# Altium PCB HumiTemPMold.PcbDoc
Units mm, origin at the board's own origin, x right, y up, seen from the top; angles counter-clockwise.
Board outline 152.4 x 101.6 mm, 2 copper layers (Top Layer, Bottom Layer); 101 components, 85 nets, 398 pads, 4 vias.
Unrouted connection lines stored in the file: 261.
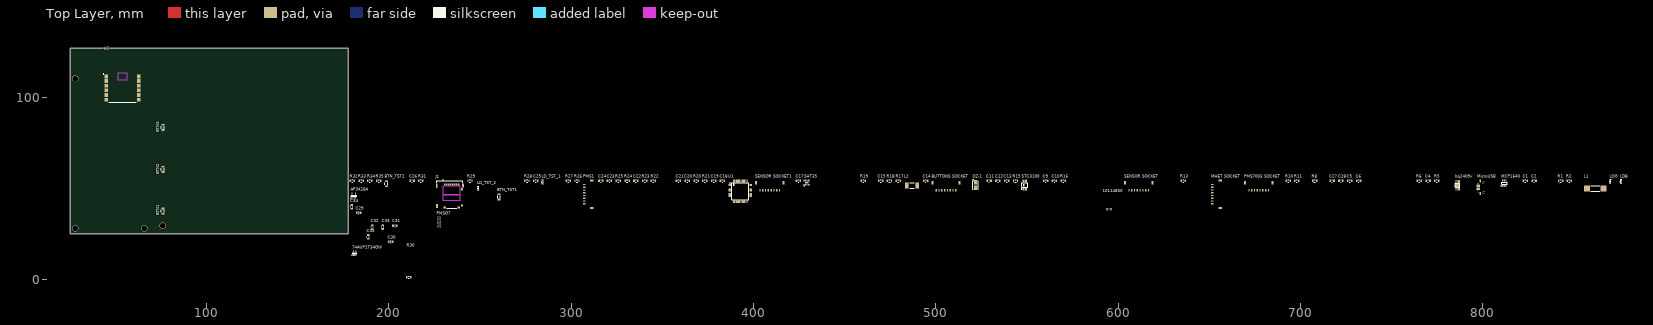
[diagram p0: Top Layer view]
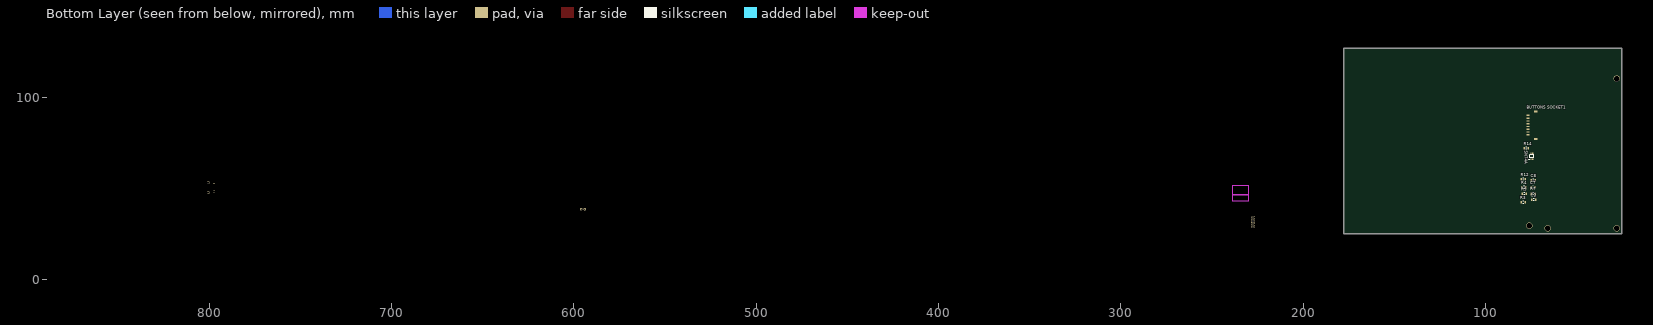
[diagram p1: Bottom Layer view, seen from below]

## Layer stack, top to bottom
Top Solder: solder mask 0.0102, Solder Resist, Dk 3.5
Top Layer: signal copper 0.0356
Dielectric 1: dielectric 0.32, FR-4, Dk 4.8
Bottom Layer: signal copper 0.0356
Bottom Solder: solder mask 0.0102, Solder Resist, Dk 3.5

## Board outline
25.4,25.4 177.8,25.4 177.8,127 25.4,127

## Design rules (kind name [scope] priority, off if disabled: settings)
Clearance [All] p1: gap=0.254 ignorepadtopadclearanceinfootprint=TRUE except(0: Arc-Hole Track-Hole SMDPad-Hole THPad-Hole Via-Hole Fill-Hole Poly-Hole Region-Hole Text-Hole; 0.15: Arc-Arc Arc-Track Arc-SMDPad Track-Track Track-SMDPad SMDPad-SMDPad Text-Text; 0.25: SMDPad-Poly SMDPad-Region)
PolygonConnect [All] p1: connectstyle=Relief reliefconductorwidth=0.254 reliefentries=4 polygonreliefangle="90 Angle" airgapwidth=0.254
RoomDefinition Esquematico [InComponentClass('Esquematico')] p1: confinementstyle=ConfineIn formatcopy=TRUE lockcomponents=FALSE outline 178.181,26.924 879.856,26.924 879.856,57.912 178.181,57.912
RoutingVias [All] p1: holewidth=0.711 width=1.27 viastyle="Through Hole" minholewidth=0.711 minwidth=1.27 maxholewidth=0.711 maxwidth=1.27
SolderMaskExpansion [All] p1: expansion=0.102
Width [All] p1: maxlimit=0.254 minlimit=0.254 preferedwidth=0.254
30 further rules are at their usual default settings.

## Components (designator, comment, footprint, x,y, rotation, side; value= is the part's Value field where it differs from the comment)
74AUP1T34GW "74AUP1T34GW" 74AUP1T34GW 181.356,14.605 r90 top
10114830 "AMPHENOL 10114830 - Conector de Cable a Placa - 1.25mm" "Molex 0353630250" 593.979,38.735 r0 top
AP3428A "AP3428A" AP3428A 180.975,46.101 r90 top
bq2409x "bq2409x" bq2409x 785.114,49.657 r90 top
BTN1 "BUTTON" BUTTON 76.2,38.1 r90 top
BTN2 "BUTTON" BUTTON 76.2,60.96 r90 top
BTN3 "BUTTON" BUTTON 76.2,83.947 r90 top
BTN_TST1 "BUTTON" BUTTON 260.477,45.847 r90 top
BTN_TST2 "BUTTON" BUTTON 198.755,53.086 r90 top
"BUTTONS SOCKET" "BUTTONS SOCKET" S8B-ZR-SM4A-TF 506.857,51.181 r90 top
"BUTTONS SOCKET1" "BUTTONS SOCKET" S8B-ZR-SM4A-TF 74.676,83.566 r180 bottom
C1 "Cap" "0805 CAP" 823.214,54.229 r0 top value=100n
C2 "Cap" "0805 CAP" 828.04,54.229 r0 top value=10u
C3 "Cap" "0805 CAP" 73.66,43.942 r180 bottom value=100n
C4 "Cap" "0805 CAP" 769.874,54.229 r0 top value=10u
C5 "Cap" "0805 CAP" 726.948,54.229 r0 top value=1u
C6 "Cap" "0805 CAP" 731.774,54.229 r0 top value=100n
C7 "Cap" "0805 CAP" 74.075,50.673 r180 bottom value=100n
C8 "Cap" "0805 CAP" 73.914,54.61 r180 bottom value=100n
C9 "Cap" "0805 CAP" 560.197,54.229 r0 top value=10u
C10 "Cap" "0805 CAP" 565.023,54.229 r0 top value=100n
C11 "Cap" "0805 CAP" 529.209,54.229 r0 top value=1u
C12 "Cap" "0805 CAP" 534.035,54.229 r0 top value=10p
C13 "Cap" "0805 CAP" 538.861,54.229 r0 top value=10u
C14 "Cap" "0805 CAP" 494.411,54.229 r0 top value=22p
C15 "Cap" "0805 CAP" 469.773,54.229 r0 top value=220n
C17 "Cap" "0805 CAP" 424.688,54.229 r0 top value=100n
C18 "Cap" "0805 CAP" 383.032,54.229 r0 top value=100n
C19 "Cap" "0805 CAP" 378.206,54.229 r0 top value=100n
C20 "Cap" "0805 CAP" 363.728,54.229 r0 top value=100n
C21 "Cap" "0805 CAP" 358.902,54.229 r0 top value=100n
C22 "Cap" "0805 CAP" 335.534,54.229 r0 top value=100n
C23 "Cap" "0805 CAP" 321.056,54.229 r0 top value=100n
C24 "Cap" "0805 CAP" 316.357,54.229 r0 top value=100n
C25 "Cap" "0805 CAP" 280.67,54.229 r0 top value=100n
C26 "Cap" "0805 CAP" 212.852,54.229 r0 top value=100n
C27 "Cap" "0805 CAP" 717.296,54.229 r0 top value=100n
C28 "Cap" "0805 CAP" 722.122,54.229 r0 top value=10u
C29 "Cap" "0805 CAP" 183.515,36.703 r0 top value=100n
C30 "Cap" "0805 CAP" 201.041,20.828 r0 top value=1u
C31 "Cap" "0805 CAP" 203.454,29.718 r0 top value=1u
C32 "Cap" "0805 CAP" 191.008,28.956 r90 top value=100n
C33 "Cap" "0805 CAP" 196.85,28.956 r90 top value=1u
C34 "Cap" "0805 CAP" 179.705,40.005 r90 top value=100n
C35 "Cap" "0805 CAP" 188.722,23.495 r90 top value=1u
DZ-1 "DZ" SMAZ5V6-TP 521.843,51.943 r90 top
J1 "MOLEX 503182-1852 (MicroSD)" "MOLEX 503182-1852 (MicroSD)" 233.559,45.964 r0 top
L1 "Inductor" INDC11030X40N 861.568,50.038 r0 top value=10u
L2 "Inductor" L2.2uH 486.918,51.689 r0 top value=2.2uH
LD_TST_1 "LED" "0603 LED-Green" 284.353,53.467 r90 top
LD_TST_2 "LED" "0603 LED-BLUE" 249.047,49.911 r90 top
LDB "LED" "0603 LED-BLUE" 875.665,53.721 r90 top
LDG "LED" "0603 LED-Green" 869.823,53.721 r90 top
MCP1640 "MCP1640" MCP1640 811.784,52.959 r90 top
"MHET SOCKET" "MHET SOCKET" S8B-ZR-SM4A-TF 653.796,45.72 r0 top
MicroUSB "MicroUSB" MicroUSB 790.067,53.975 r90 top
PMS1 "PMS7003 SOCKET" S8B-ZR-SM4A-TF 309.372,45.72 r0 top
"PMS7003 SOCKET" "PMS7003 SOCKET" S8B-ZR-SM4A-TF 678.307,51.181 r90 top
PMSG7 "PMSG7" PMSG7 226.949,29.083 r90 top
R1 "Res" "0805 Res" 842.518,54.229 r0 top value=1K5
R2 "Res" "0805 Res" 847.217,54.229 r0 top value=1K5
R3 "Res" "0805 Res" 79.502,42.418 r180 bottom value=10K
R4 "Res" "0805 Res" 79.037,50.673 r180 bottom value=10K
R5 "Res" "0805 Res" 774.7,54.229 r0 top value=10K
R6 "Res" "0805 Res" 765.048,54.229 r0 top value=976
R7 "Res" "0805 Res" 73.957,47.244 r180 bottom value=10K
R8 "Res" "0805 Res" 707.644,54.229 r0 top value=540
R9 "Res" "0805 Res" 78.994,47.117 r180 bottom value=10K
R10 "Res" "0805 Res" 693.166,54.229 r0 top value=1K
R11 "Res" "0805 Res" 697.992,54.229 r0 top value=309
R12 "Res" "0805 Res" 79.375,55.118 r180 bottom value=10K
R13 "Res" "0805 Res" 635.635,54.229 r0 top value=0
R14 "Res" "0805 Res" 77.724,72.136 r180 bottom value=10K
R15 "Res" "0805 Res" 543.687,54.229 r0 top value=30m
R16 "Res" "0805 Res" 569.849,54.229 r0 top value=430K
R17 "Res" "0805 Res" 479.425,54.229 r0 top value=1K
R18 "Res" "0805 Res" 474.599,54.229 r0 top value=200K
R19 "Res" "0805 Res" 460.121,54.229 r0 top value=100K
R20 "Res" "0805 Res" 368.554,54.229 r0 top value=10K
R21 "Res" "0805 Res" 373.38,54.229 r0 top value=1K
R22 "Res" "0805 Res" 345.186,54.229 r0 top value=4K7
R23 "Res" "0805 Res" 340.36,54.229 r0 top value=4K7
R24 "Res" "0805 Res" 330.708,54.229 r0 top value=4K7
R25 "Res" "0805 Res" 325.882,54.229 r0 top value=4K7
R26 "Res" "0805 Res" 303.276,54.229 r0 top value=10K
R27 "Res" "0805 Res" 298.45,54.229 r0 top value=10K
R28 "Res" "0805 Res" 275.844,54.229 r0 top value=1K5
R29 "Res" "0805 Res" 244.602,54.229 r0 top value=10K
R30 "Res" "0805 Res" 210.947,1.397 r0 top value=1K5
R31 "Res" "0805 Res" 217.678,54.229 r0 top value=10K
R32 "Res" "0805 Res" 180.086,54.229 r0 top value=10K
R33 "Res" "0805 Res" 184.912,54.229 r0 top value=10K
R34 "Res" "0805 Res" 189.738,54.229 r0 top value=10K
R35 "Res" "0805 Res" 194.564,54.229 r0 top value=10K
"SENSOR SOCKET" "SENSOR SOCKET" S8B-ZR-SM4A-TF 612.521,51.181 r90 top
"SENSOR SOCKET1" "SENSOR SOCKET" S8B-ZR-SM4A-TF 410.21,51.181 r90 top
SHT35 "SHT35" SHT35 429.26,53.34 r90 top
SN74A "" SN74AUP3G17DCUR 74.803,67.691 r90 bottom (schematic designator SN74AUP3G17DCUR)
STC3100 "STC3100" STC3100 548.767,51.943 r90 top
U1 "PIC32MZ2048EFH064-I/PT" PIC32MZ2048EFH064 392.811,48.514 r0 top
U2 "MRF24J40MA" MRF24J40MA 54.102,113.284 r0 top

## Footprints (in the part's own frame and the unit in brackets; to place one, negate y for a bottom-side part, rotate by r counter-clockwise, add the part's x,y. Pads: shape width x height; smd on the part's side, far side on the other; paste and mask are expansions set on the pad)
74AUP1T34GW [mm]
  rect 0.85x0.4 smd: 1(-1.1,0.65) 2(-1.1,0) 3(-1.1,-0.65) 4(1.1,-0.65) 5(1.1,0.65)
  silkscreen extent -1.22,-1.15 0.3,1.52, body extent -0.67,-1.12 0.67,1.13, height 1.1
"0603 LED-BLUE" [mm] "LED, Body 1.6x0.8mm, IPC High Density"
  rect 0.7x0.9 smd: 1(-0.75,0) 2(0.75,0)
  silkscreen extent -0.2,-0.45 1.4,0.45, body extent -0.85,-0.45 0.85,0.45, height 0.9
"0603 LED-Green" [mm] "LED, Body 1.6x0.8mm, IPC High Density"
  rect 0.7x0.9 smd: 1(-0.75,0) 2(0.75,0)
  silkscreen extent -0.2,-0.45 1.4,0.45, body extent -0.85,-0.45 0.85,0.45, height 0.9
"0805 CAP" [mm] "Chip Capacitor, 2-Leads, Body 2,00x1,25mm, IPC Medium Density"
  rect 0.9x1.4 smd: 1(-1.05,0) 2(1.05,0)
  silkscreen extent -0.2,-0.6 0.2,0.6, body extent -1,-0.6 1,0.6, height 1.2
"0805 Res" [mm] "Chip Capacitor, 2-Leads, Body 2,0x1,3mm, IPC Medium Density"
  rect 0.8x1.4 smd: 1(-1.1,0) 2(1.1,0)
  silkscreen extent -0.3,-0.6 0.3,0.6, body extent -1,-0.62 1,0.62, height 0.44
AP3428A [mm]
  rect 1.05x0.55 smd: 1(-1.325,0.95) 2(-1.325,0) 3(-1.325,-0.95) 4(1.325,-0.95) 5(1.325,0.95)
  silkscreen extent -1.45,-1.45 0.4,1.9, body extent -0.8,-1.45 0.8,1.45, height 1
bq2409x [mm]
  rect 1.5x0.25 smd: 1(0,0)
  oval 1.5x0.25 smd: 2(0,-0.5) 3(0,-1) 4(0,-1.5) 5(0,-2) 6(4.2,-2) 7(4.2,-1.5) 8(4.2,-1) 9(4.2,-0.5) 10(4.2,0)
  rect 1.57x1.88 smd: 11(2.1,-1)
  silkscreen extent 1.02,-2.16 3.17,0.25, body extent -0.43,-2.5 4.49,0.5, height 0.86
BUTTON [mm]
  rect 0.95x1.55 smd: 1(-1.8,0) 2(1.016,0)
  silkscreen extent -1.08,-0.76 0.25,0.76, body extent -1.9,-1.02 1.14,1.02, height 5.91
INDC11030X40N [mm]
  rect 3.23x3.32 smd: 1(-4.485,0) 2(4.485,0)
  silkscreen extent -2.5,-1.56 2.5,1.56, body extent -5.15,-5.15 5.15,5.15, height 4
L2.2uH [mm]
  rect 2x3.4 smd: 1(-2.87,0) 2(2.83,0)
  silkscreen extent -1.2,-1.56 1.2,1.56, body extent -3.68,-3.3 3.68,3.3, height 3
MCP1640 [mm]
  rect 1.05x0.6 smd: 1(-1.425,0.95) 2(-1.425,0) 3(-1.425,-0.95) 4(1.425,-0.95) 5(1.425,0) 6(1.425,0.95)
  silkscreen extent -1.55,-1.55 0.5,1.92, body extent -0.9,-1.55 0.9,1.55, height 1.45
MicroUSB [mm]
  rect 0.4x1.7 smd: 1(-4.445,-7.366) 2(-3.81,-7.366) 3(-3.175,-7.366) 4(-2.54,-7.366) 5(-1.905,-7.366)
  rect 1.8x0.7 smd: 5(-6.604,-8.509) 5(0.254,-8.509)
  rrect100% 1.2x1.524 hole 0.762 slot 1.2 at 90 deg: 5(-5.969,-10.287)
  rrect50% 1.1x1.3 hole 0.65 slot 1.05 at 90 deg: 5(-5.588,-7.239) 5(-0.762,-7.239)
  rrect100% 1.3x1.524 hole 0.762 slot 1.2 at 90 deg: 5(-0.508,-10.287)
  body extent -7.22,-13.12 0.82,-7.08, height 2.8
"MOLEX 503182-1852 (MicroSD)" [mm]
  rect 0.8x1.24 smd: 1(-2.9,6.355) 2(-1.8,6.355) 3(-0.7,6.355) 4(0.4,6.355) 5(1.5,6.355) 6(2.6,6.355) 7(3.7,6.355) 8(4.8,6.355)
  rect 1.16x1.2 smd: DT(6.74,-5.275)
  rect 0.95x2.5 smd: P1(-7.245,5.725)
  rect 1.15x2.2 smd: P2(7.145,5.875) P3(-7.145,-5.605)
  rect 1.5x1.15 smd: P4(-2.84,-6.4) P5(4.94,-6.4)
  rect 1.16x1.25 smd: SW(6.74,3.725)
  Keep-Out Layer region: -3.655,5.485 5.55,5.485 5.55,0.726 -3.655,0.726
  Keep-Out Layer region: -3.658,5.485 5.55,5.485 5.55,0.727 -3.658,0.727
  Keep-Out Layer region: -3.656,5.485 5.55,5.485 5.55,0.726 -3.656,0.726
  Keep-Out Layer region: -3.659,0.725 5.55,0.725 5.55,-2.682 -3.659,-2.682
  Keep-Out Layer region: -3.655,5.485 5.55,5.485 5.55,0.726 -3.655,0.726
  Keep-Out Layer region: -3.658,5.485 5.55,5.485 5.55,0.727 -3.658,0.727
  Keep-Out Layer region: -3.656,5.485 5.55,5.485 5.55,0.726 -3.656,0.726
  Keep-Out Layer region: -3.659,0.725 5.55,0.725 5.55,-2.682 -3.659,-2.682
  Keep-Out Layer region: -3.655,5.485 5.55,5.485 5.55,0.726 -3.655,0.726
  Keep-Out Layer region: -3.658,5.485 5.55,5.485 5.55,0.727 -3.658,0.727
  Keep-Out Layer region: -3.656,5.485 5.55,5.485 5.55,0.726 -3.656,0.726
  Keep-Out Layer region: -3.659,0.725 5.55,0.725 5.55,-2.682 -3.659,-2.682
  silkscreen extent -7.07,-6.73 7.07,8.99, body extent -7.37,-6.71 7.57,8.24, height 1.4
"Molex 0353630250" [mm]
  round 1.27 hole 0.8: 1(0,0) 2(2,0)
  body extent -2.83,-1.91 4.87,8.59, height 5.75
MRF24J40MA [mil] "SM Module; 12 Leads; Body 27.9x17.8x1.7mm (LxWxH), Microchip Recommended"
  rect 80x80 smd paste-159.45 mask+2: 1(-350,-70) 2(-350,-170) 3(-350,-270) 4(-350,-370) 5(-350,-470) 6(-350,-570) 7(350,-570) 8(350,-470) 9(350,-370) 10(350,-270) 11(350,-170) 12(350,-70)
  Top Layer keep-out region: -105,-140 105,-140 105,0 -105,0
  silkscreen extent -411,-630 298,-11, body extent -350,-630 350,470, height 114
PIC32MZ2048EFH064 [mm]
  rect 1.45x0.3 smd: 1(-5.7,3.75) 2(-5.7,3.25) 3(-5.7,2.75) 4(-5.7,2.25) 5(-5.7,1.75) 6(-5.7,1.25) 7(-5.7,0.75) 8(-5.7,0.25) 9(-5.7,-0.25) 10(-5.7,-0.75) 11(-5.7,-1.25) 12(-5.7,-1.75) 13(-5.7,-2.25) 14(-5.7,-2.75) 15(-5.7,-3.25) 16(-5.7,-3.75) 33(5.7,-3.75) 34(5.7,-3.25) 35(5.7,-2.75) 36(5.7,-2.25) 37(5.7,-1.75) 38(5.7,-1.25) 39(5.7,-0.75) 40(5.7,-0.25) 41(5.7,0.25) 42(5.7,0.75) 43(5.7,1.25) 44(5.7,1.75) 45(5.7,2.25) 46(5.7,2.75) 47(5.7,3.25) 48(5.7,3.75)
  rect 0.3x1.45 smd: 17(-3.75,-5.7) 18(-3.25,-5.7) 19(-2.75,-5.7) 20(-2.25,-5.7) 21(-1.75,-5.7) 22(-1.25,-5.7) 23(-0.75,-5.7) 24(-0.25,-5.7) 25(0.25,-5.7) 26(0.75,-5.7) 27(1.25,-5.7) 28(1.75,-5.7) 29(2.25,-5.7) 30(2.75,-5.7) 31(3.25,-5.7) 32(3.75,-5.7) 49(3.75,5.7) 50(3.25,5.7) 51(2.75,5.7) 52(2.25,5.7) 53(1.75,5.7) 54(1.25,5.7) 55(0.75,5.7) 56(0.25,5.7) 57(-0.25,5.7) 58(-0.75,5.7) 59(-1.25,5.7) 60(-1.75,5.7) 61(-2.25,5.7) 62(-2.75,5.7) 63(-3.25,5.7) 64(-3.75,5.7)
  silkscreen extent -5.84,-4.65 4.65,4.65, body extent -6,-6 6,6, height 1.12
PMSG7 [mm]
  round 0.95 / inner round 2.032 / far side round 0.95 hole 0.65: 1(5.08,0) 2(5.08,-1.27) 3(3.81,0) 4(3.81,-1.27) 5(2.54,0) 6(2.54,-1.27) 7(1.27,0) 8(1.27,-1.27) 9(0,0) 10(0,-1.27)
  body extent -0.84,-2.11 5.97,0.89, height 4.2
S8B-ZR-SM4A-TF [mm]
  rect 1.4x0.7 smd: 1(-2.159,6.604) 2(-2.159,5.08) 3(-2.159,3.556) 4(-2.159,2.032) 5(-2.159,0.508) 6(-2.159,-1.016) 7(-2.159,-2.54) 8(-2.159,-4.064)
  rect 1.9x1.1 smd: P1(2.032,-6.223) P2(2.032,8.763)
  body extent -2.56,-6.23 3.94,8.77, height 3.7
SHT35 [mm]
  rect 0.85x0.25 smd: 1(-1.17,0.75) 2(-1.17,0.25) 3(-1.17,-0.25) 4(-1.17,-0.75) 5(1.17,-0.75) 6(1.17,-0.25) 7(1.17,0.25) 8(1.17,0.75)
  rect 1.09x1.8 smd: 9(0,0)
  silkscreen extent -1.9,-1.45 1.45,1.5, body extent -1.3,-1.3 1.3,1.3, height 1
SMAZ5V6-TP [mm]
  rect 2.5x1.65 smd: 1(-1.575,0) 2(1.575,0)
  silkscreen extent -2.3,-1.5 3.07,1.5, body extent -2.52,-1.46 2.52,1.78, height 5.91
SN74AUP3G17DCUR [mm]
  oval 0.8x0.3 smd: 1(-1.6,0.75) 2(-1.6,0.25) 3(-1.6,-0.25) 4(-1.6,-0.75) 5(1.6,-0.75) 6(1.6,-0.25) 7(1.6,0.25) 8(1.6,0.75)
  silkscreen extent -1.72,-1.05 0.8,1.58, body extent -1.2,-1.05 1.2,1.05, height 0.9
STC3100 [mm]
  oval 1.4x0.5 smd: 1(-2.25,0.975) 2(-2.25,0.325) 3(-2.25,-0.325) 4(-2.25,-0.975) 5(2.25,-0.975) 6(2.25,-0.325) 7(2.25,0.325) 8(2.25,0.975)
  silkscreen extent -2.37,-1.6 1.15,1.9, body extent -1.55,-1.6 1.55,1.6, height 1.1

## Part data
74AUP1T34GW: Supplier Part Number 1=1727-6030-1-ND, Supplier 1=Digi-Key
10114830: Supplier Part Number 1=2100756, Supplier 1=Farnell
AP3428A: Supplier Part Number 1=AP3428AKTTR-G1DICT-ND, Supplier 1=Digi-Key
bq2409x: Supplier Part Number 1=296-38875-1-ND, Supplier 1=Digi-Key
BTN1 BTN2 BTN3 BTN_TST1 BTN_TST2: Supplier Part Number 1=CKN10779CT-ND, Supplier 1=Digi-Key
"BUTTONS SOCKET" "BUTTONS SOCKET1" "MHET SOCKET" PMS1 "PMS7003 SOCKET" "SENSOR SOCKET" "SENSOR SOCKET1": Supplier Part Number 1=455-1698-1-ND, Supplier 1=Digi-Key
C1 C3 C6 C7 C8 C10 C17 C18 C19 C20 C21 C22 C23 C24 C25 C26 C27 C29 C32 C34: Supplier Part Number 1=399-1169-1-ND, Supplier 1=Digi-Key
C2 C4 C9 C13 C28: Supplier Part Number 1=490-14661-1-ND, Supplier 1=Digi-Key
C5 C11 C30 C31 C33 C35: Supplier Part Number 1=490-8043-1-ND, Supplier 1=Digi-Key
C12: Supplier Part Number 1=490-14649-1-ND, Supplier 1=Digi-Key
C14: Supplier Part Number 1=399-1113-1-ND, Supplier 1=Digi-Key
C15: Supplier Part Number 1=490-4970-1-ND, Supplier 1=Digi-Key
DZ-1: library part "Diode Zener", Supplier Part Number 1=SMAZ5V6-TPMSCT-ND, Supplier 1=Digi-Key
J1: "MICRO SD NORMAL ULTRALOWPRO8CKTE", Package=None, Supplier Part Number 1=WM12834CT-ND, Digi-Key_Part_Number=WM12834CT-ND, Digi-Key_Purchase_URL=https://www.digikey.es/product-detail/en/molex/5031821852/WM12834CT-ND/5823232?utm_source=snapeda&utm_medium=aggregator&utm_campaign=symbol, MF=Molex, MP=5031821852, SnapEDA_Link=https://www.snapeda.com/parts/5031821852/Molex/view-part/?ref=snap, Supplier 1=Digi-Key
L1: Supplier Part Number 1=732-3389-1-ND, Code_IEC=1005, Code_JEITA=0402, LatestRevisionDate=29-May-2009, LatestRevisionNote="IPC-7351 Footprint Added.", PackageDescription="Chip Inductor", PackageReference=0402-A, Published=8-Jun-2000, Publisher="Altium Limited", Supplier 1=Digi-Key
L2: Supplier Part Number 1=308-1569-1-ND, Code_IEC=1005, Code_JEITA=0402, LatestRevisionDate=29-May-2009, LatestRevisionNote="IPC-7351 Footprint Added.", PackageDescription="Chip Inductor", PackageReference=0402-A, Published=8-Jun-2000, Publisher="Altium Limited", Supplier 1=Digi-Key
LD_TST_1 LDG: Supplier Part Number 1=160-1446-1-ND, Supplier 1=Digi-Key
LD_TST_2 LDB: Supplier Part Number 1=160-1827-1-ND, Supplier 1=Digi-Key
MCP1640: Supplier Part Number 1=MCP1640T-I/CHYCT-ND, Supplier 1=Digi-Key
MicroUSB: Supplier Part Number 1=609-4050-1-ND, Supplier 1=Digi-Key
PMSG7: Supplier Part Number 1=609-3754-ND, Supplier 1=Digi-Key
R1 R2 R28 R30: Supplier Part Number 1=RNCP0805FTD1K50CT-ND, Supplier 1=Digi-Key
R3 R4 R5 R7 R9 R12 R14 R20 R26 R27 R29 R31 R32 R33 R34 R35: Supplier Part Number 1=RNCF0805DTE10K0CT-ND, Supplier 1=Digi-Key
R6: Supplier Part Number 1=P976DACT-ND, Supplier 1=Digi-Key
R8: Supplier Part Number 1=P549DACT-ND, Supplier 1=Digi-Key
R10 R17 R21: Supplier Part Number 1=RNCP0805FTD1K00CT-ND, Supplier 1=Digi-Key
R11: Supplier Part Number 1=A110494CT-ND, Supplier 1=Digi-Key
R13: Supplier Part Number 1=RMCF0805ZT0R00CT-ND, Supplier 1=Digi-Key
R15: Supplier Part Number 1=P.03AQCT-ND, Supplier 1=Digi-Key
R16: Supplier Part Number 1=P430KDACT-ND, Supplier 1=Digi-Key
R18: Supplier Part Number 1=P200KDACT-ND, Supplier 1=Digi-Key
R19: Supplier Part Number 1=TNP100KABCT-ND, Supplier 1=Digi-Key
R22 R23 R24 R25: Supplier Part Number 1=A130138CT-ND, Supplier 1=Digi-Key
SHT35: Supplier Part Number 1=1649-1062-1-ND, Supplier 1=Digi-Key
SN74A: library part SN74AUP3G17DCUR, Supplier Part Number 1=296-25596-1-ND, Supplier 1=Digi-Key
STC3100: Supplier Part Number 1=497-10526-1-ND, Supplier 1=Digi-Key
U1: "PIC32MZ Series 2 MB Flash 512 kB RAM 200 MHz 32-Bit Microcontroller - TQFP-64", Package="TQFP-64 Microchip", Supplier Part Number 1=PIC32MZ2048EFH064-I/PT-ND, Availability=Unavailable, MF=Microchip, MP=PIC32MZ2048EFH064-I/PT, Price=None, SnapEDA_Link=https://www.snapeda.com/parts/PIC32MZ2048EFH064-I/PT/Microchip/view-part/?ref=snap, Supplier 1=Digi-Key
U2: "Wireless Transceiver Module", Package="Module Microchip", Supplier Part Number 1=MRF24J40MA-I/RM-ND, Digi-Key_Part_Number=MRF24J40MAT-I/RMTR-ND, Digi-Key_Purchase_URL=https://www.digikey.es/product-detail/en/microchip-technology/MRF24J40MAT-I-RM/MRF24J40MAT-I-RMTR-ND/2002555?utm_source=snapeda&utm_medium=aggregator&utm_campaign=symbol, MF=Microchip, MP=MRF24J40MA, SnapEDA_Link=https://www.snapeda.com/parts/MRF24J40MA/Microchip/view-part/?ref=snap, Supplier 1=Digi-Key

## Via types
v1: diameter 3.5, hole 3, Top Layer to Bottom Layer, 4 vias

## Nets (pads, with @x,y where several pads share a name; then routed paths per layer and width w, separated by ;. In a path a pad name is that pad's centre, name@x,y a point inside that pad or via, vN(x,y) a via of type N, cw(c..) or ccw(c..) an arc to the next point about the centre after c; other vN are vias at no path point)
GND: 74AUP1T34GW.3 10114830.2 "BUTTONS SOCKET.7" "MHET SOCKET.7" "PMS7003 SOCKET.7" "SENSOR SOCKET.6" AP3428A.2 bq2409x.3 bq2409x.11 BTN_TST1.2 BTN_TST2.2 C1.1 C2.1 C4.1 C5.1 C6.1 C9.1 C10.1 C11.1 C12.1 C12.2 C13.1 C15.2 C18.1 C19.2 C20.1 C21.1 C22.2 C23.2 C24.1 C25.2 C26.2 C27.1 C28.1 C29.1 C30.1 C34.2 C35.2 DZ-1.1 J1.6 J1.DT J1.P1 J1.P2 J1.P3 J1.P4 J1.P5 MCP1640.2 MicroUSB.5 R5.1 R8.1 R10.1 R11.2 R15.1 R15.2 R18.2 R19.1 STC3100.5 STC3100.6 U1.7 U1.20 U1.25 U1.34 U1.35 U1.40 U1.55 U1.59 U2.1 U2.11 U2.12
Net74AUP1T34GW_1: 74AUP1T34GW.1 "BUTTONS SOCKET.8" "MHET SOCKET.8" "SENSOR SOCKET.4" C13.2 C14.2 C18.2 C19.1 C21.2 C22.1 C23.1 C24.2 C29.2 C30.2 C34.1 C35.1 J1.4 L2.2 R16.2 R20.2 R22.1 R23.1 R24.1 R25.1 R27.2 R28.1 R30.2 R31.2 R32.1 R33.1 R34.1 R35.1 U1.8 U1.19 U1.26 U1.39 U1.54 U1.60 U2.10
Net74AUP1T34GW_2: 74AUP1T34GW.2 U1.24
Net74AUP1T34GW_4: 74AUP1T34GW.4 MCP1640.3
Net74AUP1T34GW_5: 74AUP1T34GW.5 10114830.1 AP3428A.1 AP3428A.3 bq2409x.10 C1.2 C2.2 C9.2 C10.2 C11.2 DZ-1.2 L1.2 MCP1640.6 R1.1 R2.2 R17.1 STC3100.7
NetAP3428A_4: AP3428A.4 C14.1 R16.1 R19.2
NetAP3428A_5: AP3428A.5 L2.1
Netbq2409x_1: bq2409x.1 C5.2 C6.2 C27.2 C28.2 MicroUSB.1
Netbq2409x_2: bq2409x.2 R8.2 R13.1
Netbq2409x_4: bq2409x.4 R10.2
Netbq2409x_5: bq2409x.5 LDG.2
Netbq2409x_7: bq2409x.7 R13.2
Netbq2409x_8: bq2409x.8 LDB.2
Netbq2409x_9: bq2409x.9 R5.2
NetBTN1_1: BTN1.1 R3.1 R4.1
NetBTN1_2: "BUTTONS SOCKET1.2" BTN1.2 BTN2.2 BTN3.2 C3.2 C7.2 C8.2 SN74A.4
NetBTN2_1: BTN2.1 R7.1 R9.1
NetBTN3_1: BTN3.1 R12.1 R14.1
NetBTN_TST1_1: BTN_TST1.1 R26.1 R27.1
NetBTN_TST2_1: BTN_TST2.1 R29.1 R31.1
"NetBUTTONS SOCKET1_1": "BUTTONS SOCKET1.1" R4.2 R9.2 R14.2 SN74A.8
"NetBUTTONS SOCKET1_4": "BUTTONS SOCKET1.4" SN74A.2
"NetBUTTONS SOCKET1_6": "BUTTONS SOCKET1.6" SN74A.5
"NetBUTTONS SOCKET1_8": "BUTTONS SOCKET1.8" SN74A.7
"NetBUTTONS SOCKET_1": "BUTTONS SOCKET.1" U1.63
"NetBUTTONS SOCKET_3": "BUTTONS SOCKET.3" U1.57
"NetBUTTONS SOCKET_5": "BUTTONS SOCKET.5" U1.56
NetC3_1: C3.1 R3.2 SN74A.1
NetC4_2: "PMS7003 SOCKET.8" C4.2 MCP1640.5 R6.1
NetC7_1: C7.1 R7.2 SN74A.3
NetC8_1: C8.1 R12.2 SN74A.6
NetC15_1: C15.1 R17.2 STC3100.8
NetC17_1: "SENSOR SOCKET1.3" C17.1 C31.1 SHT35.2 SHT35.8 SHT35.9
NetC17_2: "SENSOR SOCKET1.5" C17.2 C31.2 SHT35.5
NetC20_2: C20.2 R20.1 R21.1
NetC25_1: C25.1 R26.2 U1.13
NetC26_1: C26.1 R29.2 U1.14
NetC32_1: C32.1 C33.1 PMS1.1 PMSG7.1 PMSG7.2
NetC32_2: C32.2 C33.2 PMS1.2 PMSG7.3 PMSG7.4
NetJ1_2: J1.2 R32.2 U1.16
NetJ1_3: J1.3 R33.2 U1.5
NetJ1_5: J1.5 R35.2 U1.29
NetJ1_7: J1.7 R34.2 U1.6
NetJ1_SW: J1.SW U1.12
NetL1_1: L1.1 MCP1640.1
NetLD_TST_1_1: LD_TST_1.1 R28.2
NetLD_TST_1_2: LD_TST_1.2 U1.21
NetLD_TST_2_1: LD_TST_2.1 R30.1
NetLD_TST_2_2: LD_TST_2.2 U1.22
NetLDB_1: LDB.1 R2.1
NetLDG_1: LDG.1 R1.2
NetMCP1640_4: MCP1640.4 R6.2 R11.1
"NetMHET SOCKET_1": "MHET SOCKET.1" U1.64
"NetMHET SOCKET_2": "MHET SOCKET.2" U1.3
"NetMHET SOCKET_3": "MHET SOCKET.3" U1.2
"NetMHET SOCKET_4": "MHET SOCKET.4" U1.10
"NetMHET SOCKET_5": "MHET SOCKET.5" U1.4
"NetMHET SOCKET_6": "MHET SOCKET.6" U1.1
NetPMS1_3: PMS1.3 PMSG7.10
NetPMS1_4: PMS1.4 PMSG7.7
NetPMS1_5: PMS1.5 PMSG7.9
NetPMS1_6: PMS1.6 PMSG7.5
"NetPMS7003 SOCKET_3": "PMS7003 SOCKET.3" U1.32
"NetPMS7003 SOCKET_4": "PMS7003 SOCKET.4" U1.23
"NetPMS7003 SOCKET_5": "PMS7003 SOCKET.5" U1.15
"NetPMS7003 SOCKET_6": "PMS7003 SOCKET.6" U1.31
NetR18_1: R18.1 STC3100.2
NetR21_2: R21.2 U1.9
NetR22_2: "SENSOR SOCKET.3" R22.2 U1.51
NetR23_2: "SENSOR SOCKET.1" R23.2 U1.50
NetR24_2: R24.2 STC3100.4 U1.44
NetR25_2: R25.2 STC3100.3 U1.43
"NetSENSOR SOCKET1_4": "SENSOR SOCKET1.4" SHT35.6
"NetSENSOR SOCKET1_6": "SENSOR SOCKET1.6" SHT35.4
"NetSENSOR SOCKET1_7": "SENSOR SOCKET1.7" SHT35.3
"NetSENSOR SOCKET1_8": "SENSOR SOCKET1.8" SHT35.1
"NetSENSOR SOCKET_2": "SENSOR SOCKET.2" U1.17
"NetSENSOR SOCKET_5": "SENSOR SOCKET.5" U1.62
NetU1_30: U1.30 U2.8
NetU1_46: U1.46 U2.4
NetU1_47: U1.47 U2.5
NetU1_48: U1.48 U2.7
NetU1_49: U1.49 U2.6
NetU1_58: U1.58 U2.3
NetU1_61: U1.61 U2.2
pads on no net: "BUTTONS SOCKET1.3" "BUTTONS SOCKET1.5" "BUTTONS SOCKET1.7" "BUTTONS SOCKET1.P1" "BUTTONS SOCKET1.P2" "BUTTONS SOCKET.2" "BUTTONS SOCKET.4" "BUTTONS SOCKET.6" "BUTTONS SOCKET.P1" "BUTTONS SOCKET.P2" "MHET SOCKET.P1" "MHET SOCKET.P2" "PMS7003 SOCKET.1" "PMS7003 SOCKET.2" "PMS7003 SOCKET.P1" "PMS7003 SOCKET.P2" "SENSOR SOCKET1.1" "SENSOR SOCKET1.2" "SENSOR SOCKET1.P1" "SENSOR SOCKET1.P2" "SENSOR SOCKET.7" "SENSOR SOCKET.8" "SENSOR SOCKET.P1" "SENSOR SOCKET.P2" bq2409x.6 J1.1 J1.8 MicroUSB.2 MicroUSB.3 MicroUSB.4 PMS1.7 PMS1.8 PMS1.P1 PMS1.P2 PMSG7.6 PMSG7.8 SHT35.7 STC3100.1 U1.11 U1.18 U1.27 U1.28 U1.33 U1.36 U1.37 U1.38 U1.41 U1.42 U1.45 U1.52 U1.53 U2.9
copper on no net:
  other v1: 66.04,28.194 28.067,28.321 76.2,29.591 28.194,110.363

## Silkscreen, mask and mechanical layers (free items; w line width, h text height)
Mechanical 13:
  lines w0.254: 25.397,28.067 ccw(c28.067,28.067) 28.067,25.397 ; 25.397,110.617 cw(c28.067,110.617) 28.067,113.287 ; 25.4,28.067 25.4,110.744 ; 27.94,113.284 66.04,113.284 ; 28.067,25.4 66.04,25.4 ; 66.04,25.397 ccw(c66.04,28.067) 68.71,28.067 ; 66.04,113.287 cw(c66.04,110.617) 68.71,110.617 ; 68.707,28.067 68.707,110.617 ; 68.707,35.052 cw(c69.723,35.052) 70.739,35.052 ; 68.707,45.212 ccw(c69.723,45.212) 70.739,45.212 ; 68.707,62.103 cw(c69.723,62.103) 70.739,62.103 ; 68.707,76.581 ccw(c69.723,76.581) 70.739,76.581 ; 70.736,28.07 ccw(c73.406,28.07) 73.406,25.4 78.994,25.4 ; 70.736,93.091 cw(c73.406,93.091) 73.406,95.761 ; 70.739,28.067 70.739,93.091 ; 73.406,95.758 78.997,95.758 cw(c78.997,93.091) 81.664,93.091 ; 78.991,25.397 ccw(c78.991,28.067) 81.661,28.067 81.661,93.345